# Altium PCB AP2-Core.PcbDoc (part 1 of 3)
Units mm, origin at the board's own origin, x right, y up, seen from the top; angles counter-clockwise.
Board outline 50.2 x 44.2 mm, 4 copper layers (顶层, MidLayer1, MidLayer2, 底层); 65 components, 157 nets, 448 pads, 134 vias.
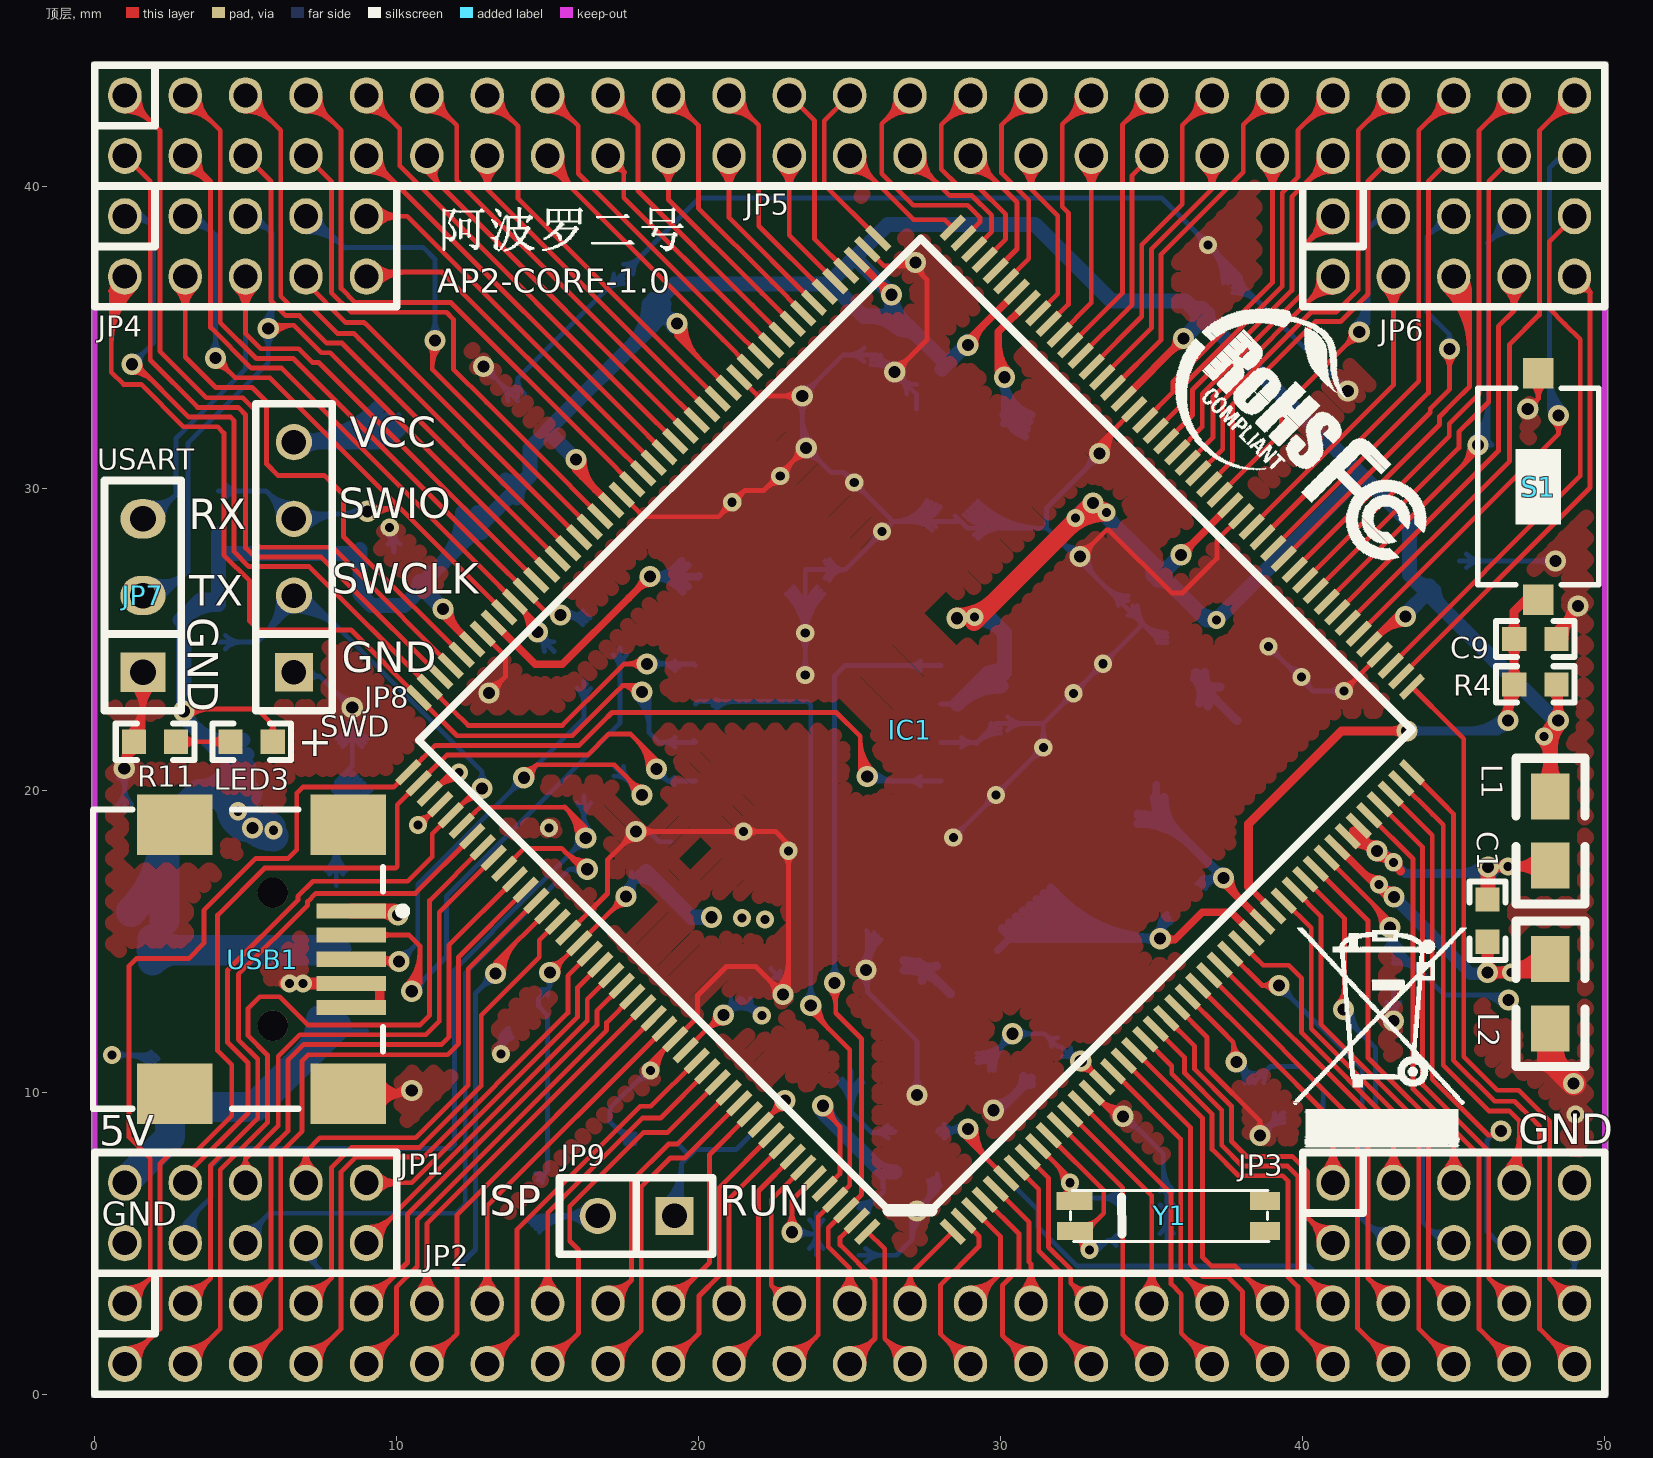
[diagram p0: 顶层 view]
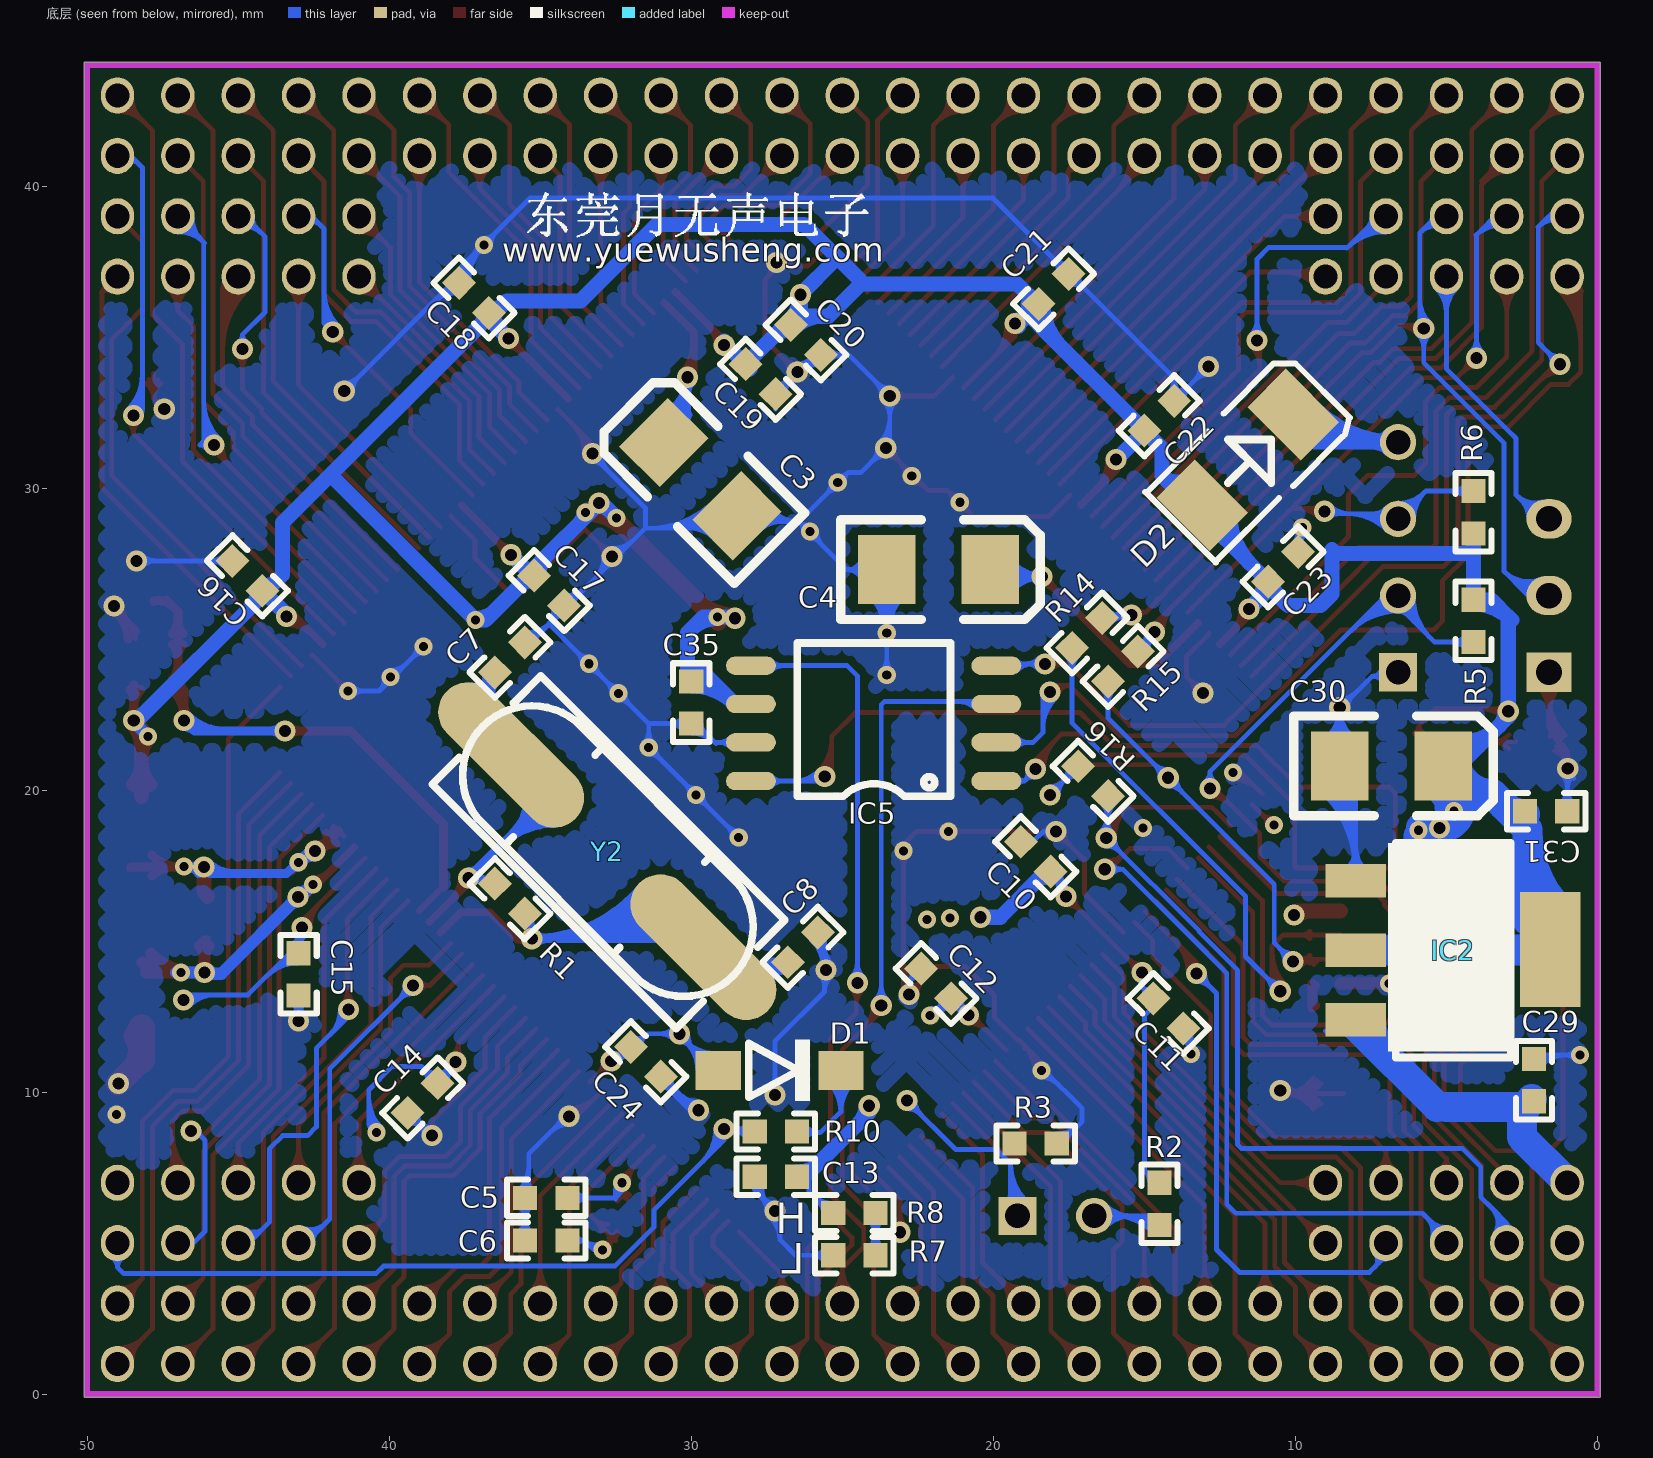
[diagram p1: 底层 view, seen from below]
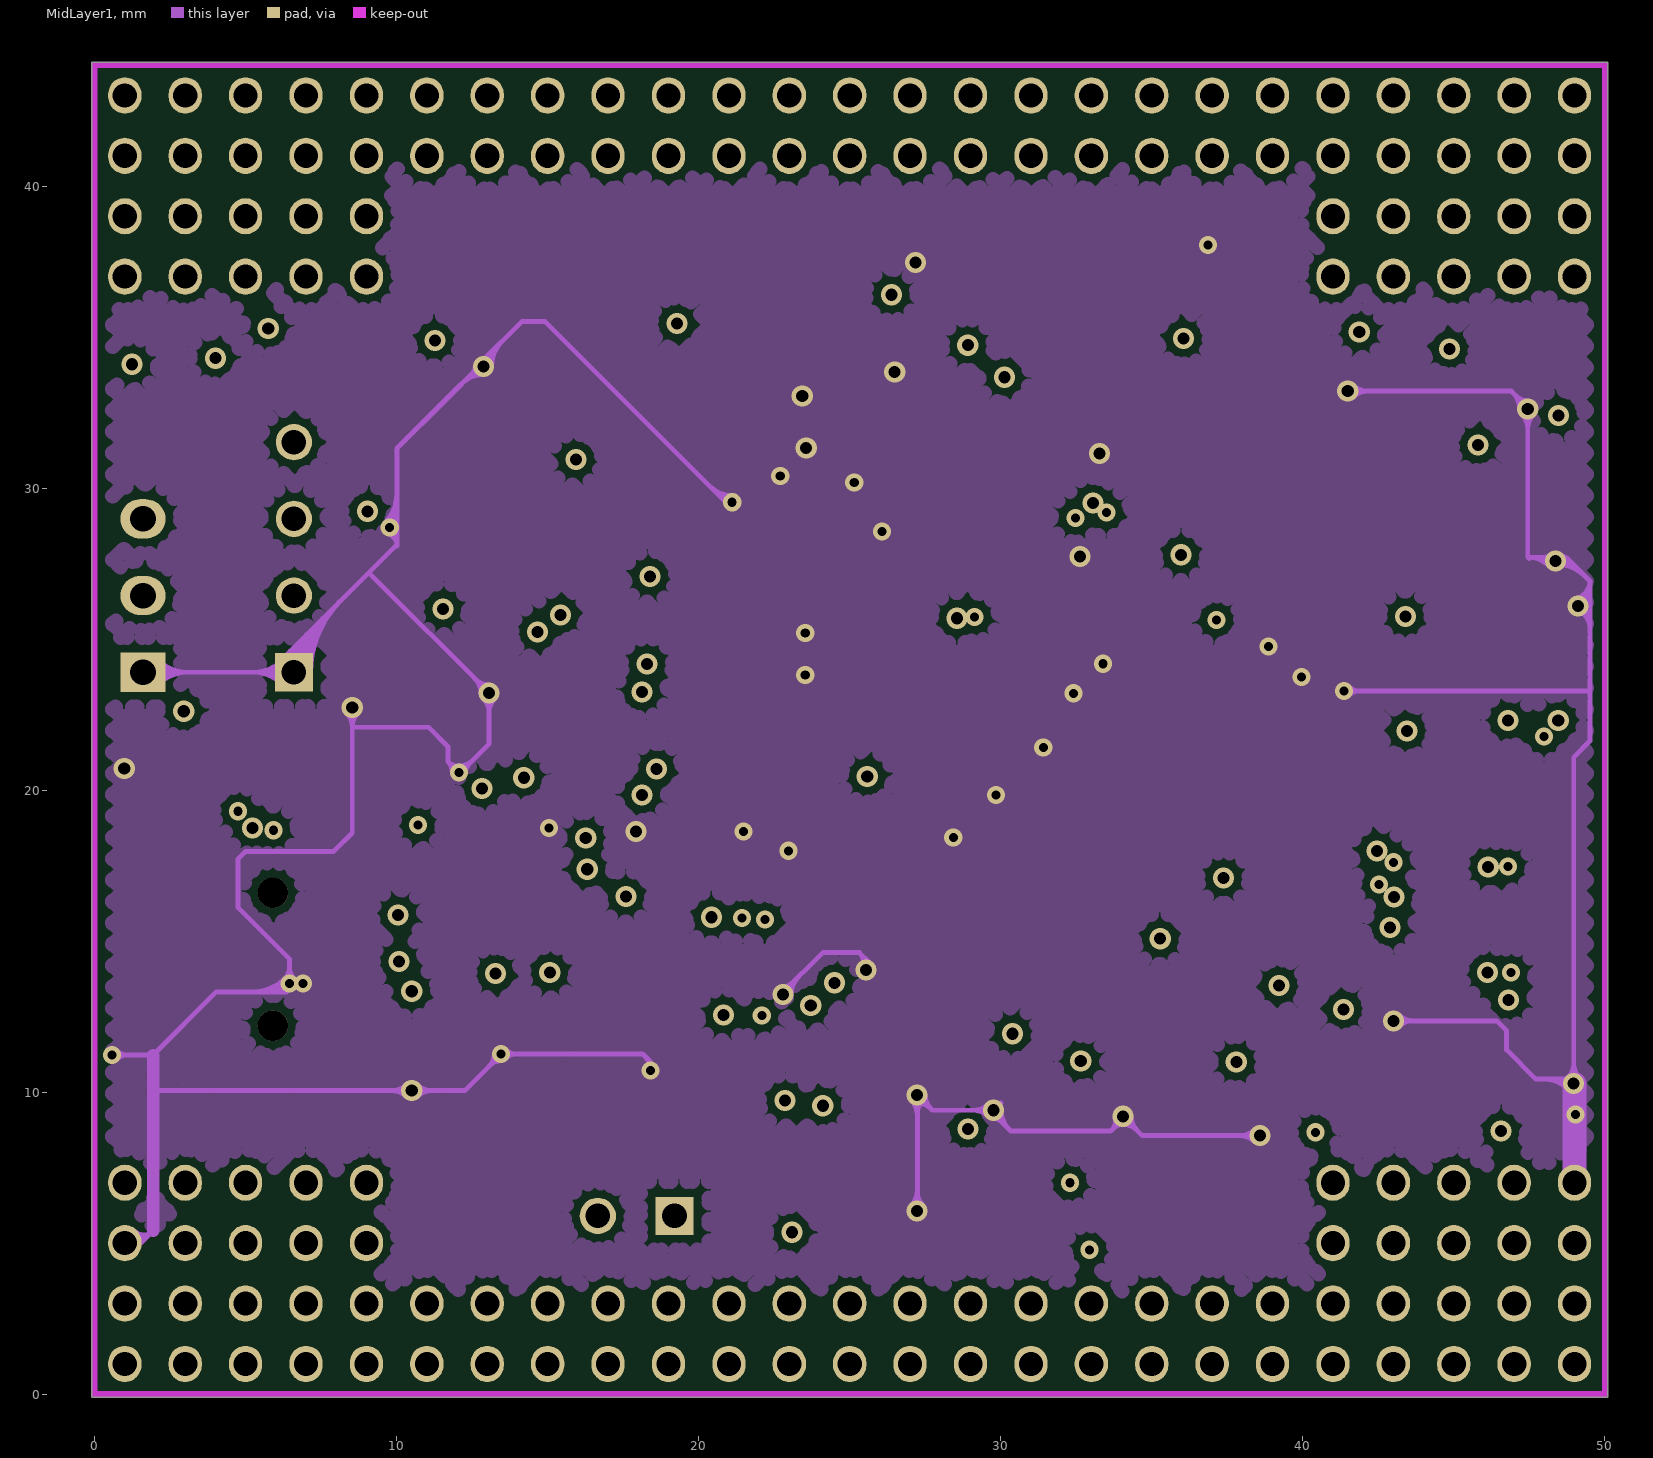
[diagram p2: MidLayer1]
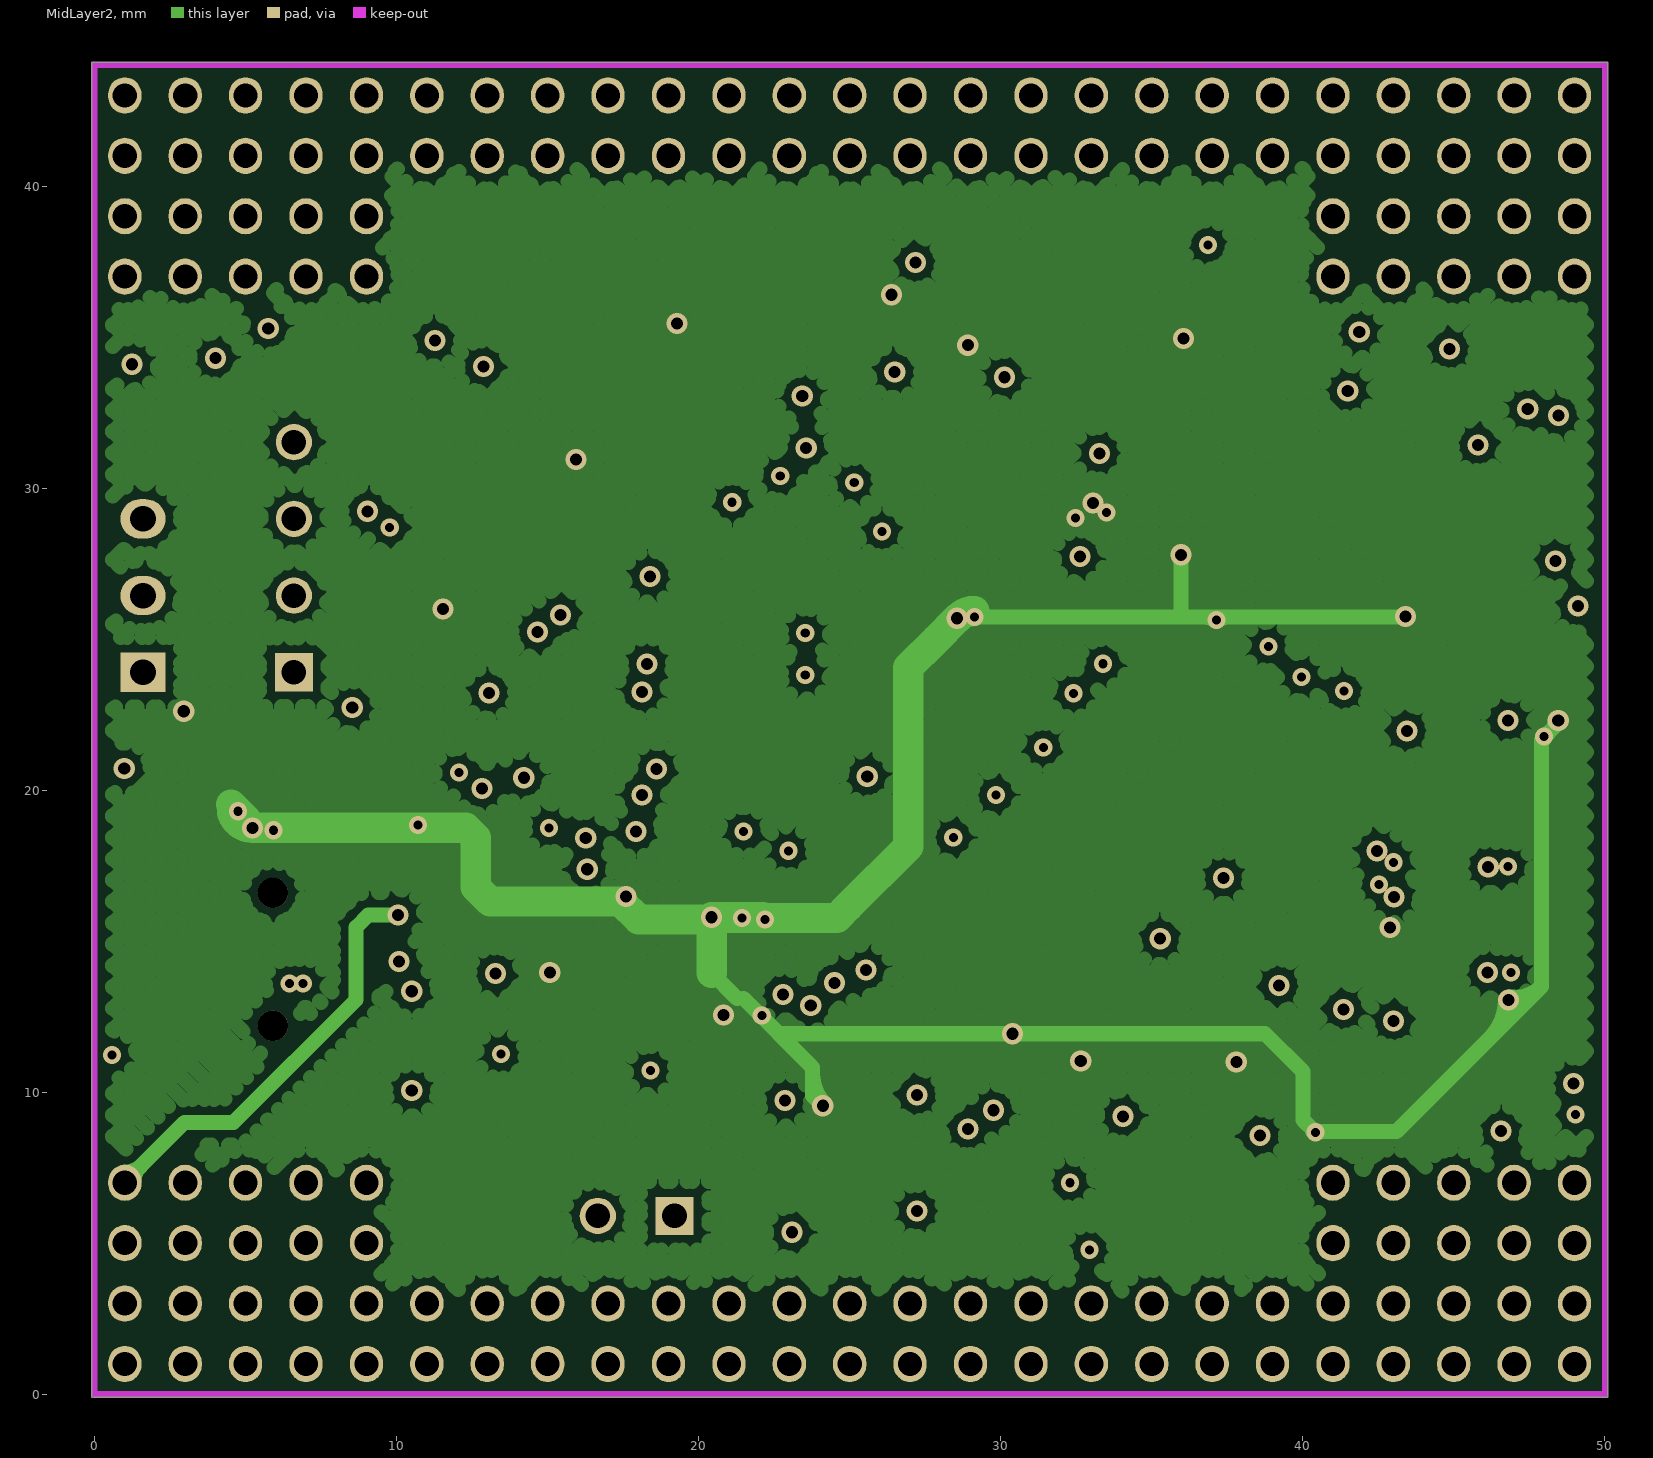
[diagram p3: MidLayer2]

## Layer stack, top to bottom
顶层: signal copper 0.0356
Dielectric: core 0.32, FR-4, Dk 4.8
MidLayer1: signal copper 0.0356
Dielectric: prepreg 0.32, FR-4, Dk 4.8
MidLayer2: signal copper 0.0356
Dielectric: core 0.32, FR-4, Dk 4.8
底层: signal copper 0.0356

## Board outline
-0.1,-0.1 50.1,-0.1 50.1,44.1 -0.1,44.1

## Design rules (kind name [scope] priority, off if disabled: settings)
Clearance 留空 [All] p1: gap=0.16
ComponentClearance 元件留空 [All] p1 off: gap=0.254 collisioncheckmode=3 verticalgap=0.254 showdistances=FALSE
FabricationTestPointUsage 测试点用法 [All] p1: valid=0 allowmultiple=FALSE
FabricationTestpoint 测试点 [All] p1: side=3 testpointundercomponent=TRUE minsize=1.016 maxsize=2.54 preferedsize=1.524 minholesize=0.508 maxholesize=1.016 preferedholesize=0.813 testpointgrid=0.025 allowsidetop=TRUE allowsidebottom=TRUE usegrid=TRUE gridtolerance=0
HoleSize 孔尺寸 [All] p1: absolutevalues=TRUE maxlimit=2.54 minlimit=0.025 maxpercent=80.000 minpercent=20.000
LayerPairs 层对 [All] p1: enforce=TRUE
PasteMaskExpansion 阻粘层扩充 [All] p1: expansion=0
PlaneClearance Plane留空 [All] p1: clearance=0.508
PlaneConnect Plane连接 [All] p1: planeconnectstyle=NoConnect reliefexpansion=0.508 reliefentries=4 reliefconductorwidth=0.254 reliefairgap=0.254
PolygonConnect 多边形连接 [All] p1: connectstyle=NoConnect reliefconductorwidth=0.254 reliefentries=4 polygonreliefangle="45 Angle" airgapwidth=0.254
RoutingCorners 布线拐角 [All] p1: cornerstyle=45-Degree minsetback=2.54 maxsetback=2.54
RoutingLayers 布线层 [All] p1: top layer_v5=FALSE mid layer 1_v5=FALSE mid layer 2_v5=FALSE bottom layer_v5=FALSE
RoutingPriority 布线优先级 [All] p1: routingpriority=0
RoutingTopology 布线拓扑 [All] p1: topology=Shortest
RoutingVias 布线过孔 [All] p1: holewidth=0.4 width=0.7 viastyle="Through Hole" minholewidth=0.4 minwidth=0.7 maxholewidth=1.5 maxwidth=2
ShortCircuit 短路 [All] p1: allowed=FALSE
SolderMaskExpansion 阻焊层扩充 [All] p1: expansion=0.102
UnRoutedNet 未布线网络 [All] p1:
Width 宽度 [All] p1: maxlimit=1 minlimit=0.16 preferedwidth=0.16
14 further rules are at their usual default settings.

## Components (designator, comment, footprint, x,y, rotation, side; value= is the part's Value field where it differs from the comment)
C1 "104" 0603P 46.12,14.98 r90 top
C3 "2.2uF" 3528 30.91,31.51 r45 bottom
C4 "2.2uF" 3528 20.1,27.3 r180 bottom
C5 "15" 0603P 35.5,6.5 r180 bottom
C6 "15" 0603P 35.5,5.088 r180 bottom
C7 "15" 0603P 36.5,23.9 r135 bottom
C8 "15" 0603P 26.8,14.3 r135 bottom
C9 "104" 0603P 47,25 r0 top
C10 "104" 0603P 18.1,17.3 r45 bottom
C11 "104" 0603P 14.7,13.1 r225 bottom
C12 "104" 0603P 21.4,13.1 r45 bottom
C13 "104" 0603P 26.5,7.2 r0 bottom
C14 "104" 0603P 38.4,10.3 r315 bottom
C15 "104" 0603P 43,14.6 r270 bottom
C16 "104" 0603P 44.2,26.6 r45 bottom
C17 "104" 0603P 35.2,27.1 r225 bottom
C18 "104" 0603P 36.7,35.8 r45 bottom
C19 "104" 0603P 28.2,34.1 r225 bottom
C20 "104" 0603P 26.7,35.4 r225 bottom
C21 "104" 0603P 18.5,36.1 r135 bottom
C22 "104" 0603P 15,31.9 r135 bottom
C23 "104" 0603P 10.9,26.9 r135 bottom
C24 "104" 0603P 32,11.5 r225 bottom
C29 "104" 0603P 2.1,11.1 r270 bottom
C30 "22uF" 3528 5.1,20.8 r180 bottom
C31 "104" 0603P 1,19.3 r0 bottom
C35 "104" 0603P 30,23.6 r270 bottom
D1 "4148" DIODE_SOP 29.11,10.72 r180 bottom
D2 "5817" T5817 9.1,33.3 r135 bottom
IC1 "STM32_176" LQFP176 27,22 r45 top locked
IC2 "AMS1117-3.3" SOT-223 8,17 r270 bottom
IC5 "AT45DBX" SOIC-8 19.9,20.3 r0 bottom
JP1 "" DIP2.0-10 1,7 r0 top locked
JP2 "" DIP2.0-50 1,3 r0 top locked
JP3 "" DIP2.0-10 41,7 r0 top locked
JP4 "" DIP2.0-10 1,39 r0 top locked
JP5 "" DIP2.0-50 1,43 r0 top locked
JP6 "" DIP2.0-10 41,39 r0 top locked
JP7 "USART" SIP3 1.6,23.9 r90 top
JP8 "SWD" SIP4 6.6,23.9 r90 top
JP9 "BOOT0" SIP2 19.2,5.9 r180 top
L1 "100uH" 0805 48.2,17.5 r90 top
L2 "100uH" 0805 48.2,14.4 r270 top
LED3 "POWER" 0603P 5.9,21.6 r180 top
R1 "105" 0603P 36.5,16.9 r225 bottom
R2 "102" 0603P 14.5,5.6 r90 bottom
R3 "103" 0603P 17.9,8.3 r0 bottom
R4 "103" 0603P 48.4,23.5 r180 top
R5 "103" 0603P 4.1,26.3 r270 bottom
R6 "103" 0603P 4.1,28.5 r90 bottom
R7 "103" 0603P 25.3,4.6 r180 bottom
R8 "103" 0603P 25.3,6 r180 bottom
R10 "1.5K" 0603P 27.9,8.7 r180 bottom
R11 "510" 0603P 2.7,21.6 r180 top
R14 "10" 0603P 16.4,25.7 r315 bottom
R15 "10" 0603P 16.2,23.6 r135 bottom
R16 "1.5K" 0603P 16.2,19.8 r45 bottom
S1 "RESRT" SW-PB2 47.8,26.3 r90 top
USB1 "USB" MINIUSB-SMB 8.5,16 r180 top locked
Y1 "32768" MC-146 35.6,5.9 r0 top
Y2 "25M" XTALV-49USMD 29.6,14.8 r45 bottom
? "" YWS 35,39 r180 bottom
? "" HS 42.562,12.573 r0 top
? "" fc 40.5,31.2 r315 top
? "" apllo2 11.6,38.1 r0 top

## Footprints (in the part's own frame and the unit in brackets; to place one, negate y for a bottom-side part, rotate by r counter-clockwise, add the part's x,y. Pads: shape width x height; smd on the part's side, far side on the other; paste and mask are expansions set on the pad)
0603P [mm]
  rect 0.8x0.8 smd: 1(0,0) 2(1.4,0)
  silkscreen extent -0.6,-0.6 2,0.6
0805 [mil]
  rect 60x50 smd: 1(0,0) 2(90,0)
  silkscreen extent -50,-45 140,45
3528 [mil]
  rect 75x90 smd: 1(0,0) 2(-135,0)
  silkscreen extent -195,-65 65,65
apllo2 [mm]
  silkscreen extent -0.06,-0.25 7.89,1.2
DIODE_SOP [mm]
  rect 1.5x1.3 smd: 1(0,0) 2(4.064,0)
  silkscreen extent 1.02,-1.02 3.05,1.02
DIP2.0-10 [mm]
  oval 1.1x1.2 hole 0.8: 1(0,0) 2(0,-2) 3(2,0) 4(2,-2) 5(4,0) 6(4,-2) 7(6,0) 8(6,-2) 9(8,0) 10(8,-2)
  silkscreen extent -1,-3 9,1
DIP2.0-50 [mm]
  oval 1.1x1.2 hole 0.8: 1(0,0) 2(0,-2) 3(2,0) 4(2,-2) 5(4,0) 6(4,-2) 7(6,0) 8(6,-2) 9(8,0) 10(8,-2) 11(10,0) 12(10,-2) 13(12,0) 14(12,-2) 15(14,0) 16(14,-2) 17(16,0) 18(16,-2) 19(18,0) 20(18,-2) 21(20,0) 22(20,-2) 23(22,0) 24(22,-2) 25(24,0) 26(24,-2) 27(26,0) 28(26,-2) 29(28,0) 30(28,-2) 31(30,0) 32(30,-2) 33(32,0) 34(32,-2) 35(34,0) 36(34,-2) 37(36,0) 38(36,-2) 39(38,0) 40(38,-2) 41(40,0) 42(40,-2) 43(42,0) 44(42,-2) 45(44,0) 46(44,-2) 47(46,0) 48(46,-2) 49(48,0) 50(48,-2)
  silkscreen extent -1,-3 49,1
fc [mm]
  silkscreen extent -5.53,-2.62 4.36,3
HS [mm]
  silkscreen extent -2.87,-4.39 2.87,2.87
LQFP176 [mm]
  round 1 on Top Overlay: 0(0,0)
  rect 0.25x1 smd: 1(-10.75,-12.75) 2(-10.25,-12.75) 3(-9.75,-12.75) 4(-9.25,-12.75) 5(-8.75,-12.75) 6(-8.25,-12.75) 7(-7.75,-12.75) 8(-7.25,-12.75) 9(-6.75,-12.75) 10(-6.25,-12.75) 11(-5.75,-12.75) 12(-5.25,-12.75) 13(-4.75,-12.75) 14(-4.25,-12.75) 15(-3.75,-12.75) 16(-3.25,-12.75) 17(-2.75,-12.75) 18(-2.25,-12.75) 19(-1.75,-12.75) 20(-1.25,-12.75) 21(-0.75,-12.75) 22(-0.25,-12.75) 23(0.25,-12.75) 24(0.75,-12.75) 25(1.25,-12.75) 26(1.75,-12.75) 27(2.25,-12.75) 28(2.75,-12.75) 29(3.25,-12.75) 30(3.75,-12.75) 31(4.25,-12.75) 32(4.75,-12.75) 33(5.25,-12.75) 34(5.75,-12.75) 35(6.25,-12.75) 36(6.75,-12.75) 37(7.25,-12.75) 38(7.75,-12.75) 39(8.25,-12.75) 40(8.75,-12.75) 41(9.25,-12.75) 42(9.75,-12.75) 43(10.25,-12.75) 44(10.75,-12.75) 89(10.75,12.25) 90(10.25,12.25) 91(9.75,12.25) 92(9.25,12.25) 93(8.75,12.25) 94(8.25,12.25) 95(7.75,12.25) 96(7.25,12.25) 97(6.75,12.25) 98(6.25,12.25) 99(5.75,12.25) 100(5.25,12.25) 101(4.75,12.25) 102(4.25,12.25) 103(3.75,12.25) 104(3.25,12.25) 105(2.75,12.25) 106(2.25,12.25) 107(1.75,12.25) 108(1.25,12.25) 109(0.75,12.25) 110(0.25,12.25) 111(-0.25,12.25) 112(-0.75,12.25) 113(-1.25,12.25) 114(-1.75,12.25) 115(-2.25,12.25) 116(-2.75,12.25) 117(-3.25,12.25) 118(-3.75,12.25) 119(-4.25,12.25) 120(-4.75,12.25) 121(-5.25,12.25) 122(-5.75,12.25) 123(-6.25,12.25) 124(-6.75,12.25) 125(-7.25,12.25) 126(-7.75,12.25) 127(-8.25,12.25) 128(-8.75,12.25) 129(-9.25,12.25) 130(-9.75,12.25) 131(-10.25,12.25) 132(-10.75,12.25)
  rect 1x0.25 smd: 45(12.75,-10.75) 46(12.75,-10.25) 47(12.75,-9.75) 48(12.75,-9.25) 49(12.75,-8.75) 50(12.75,-8.25) 51(12.75,-7.75) 52(12.75,-7.25) 53(12.75,-6.75) 54(12.75,-6.25) 55(12.75,-5.75) 56(12.75,-5.25) 57(12.75,-4.75) 58(12.75,-4.25) 59(12.75,-3.75) 60(12.75,-3.25) 61(12.75,-2.75) 62(12.75,-2.25) 63(12.75,-1.75) 64(12.75,-1.25) 65(12.75,-0.75) 66(12.75,-0.25) 67(12.75,0.25) 68(12.75,0.75) 69(12.75,1.25) 70(12.75,1.75) 71(12.75,2.25) 72(12.75,2.75) 73(12.75,3.25) 74(12.75,3.75) 75(12.75,4.25) 76(12.75,4.75) 77(12.75,5.25) 78(12.75,5.75) 79(12.75,6.25) 80(12.75,6.75) 81(12.75,7.25) 82(12.75,7.75) 83(12.75,8.25) 84(12.75,8.75) 85(12.75,9.25) 86(12.75,9.75) 87(12.75,10.25) 88(12.75,10.75) 133(-12.75,10.75) 134(-12.75,10.25) 135(-12.75,9.75) 136(-12.75,9.25) 137(-12.75,8.75) 138(-12.75,8.25) 139(-12.75,7.75) 140(-12.75,7.25) 141(-12.75,6.75) 142(-12.75,6.25) 143(-12.75,5.75) 144(-12.75,5.25) 145(-12.75,4.75) 146(-12.75,4.25) 147(-12.75,3.75) 148(-12.75,3.25) 149(-12.75,2.75) 150(-12.75,2.25) 151(-12.75,1.75) 152(-12.75,1.25) 153(-12.75,0.75) 154(-12.75,0.25) 155(-12.75,-0.25) 156(-12.75,-0.75) 157(-12.75,-1.25) 158(-12.75,-1.75) 159(-12.75,-2.25) 160(-12.75,-2.75) 161(-12.75,-3.25) 162(-12.75,-3.75) 163(-12.75,-4.25) 164(-12.75,-4.75) 165(-12.75,-5.25) 166(-12.75,-5.75) 167(-12.75,-6.25) 168(-12.75,-6.75) 169(-12.75,-7.25) 170(-12.75,-7.75) 171(-12.75,-8.25) 172(-12.75,-8.75) 173(-12.75,-9.25) 174(-12.75,-9.75) 175(-12.75,-10.25) 176(-12.75,-10.75)
  silkscreen extent -11.75,-11.75 11.75,11.25
MC-146 [mm]
  rect 1.2x0.6 smd: 1(-3.153,0.501) 2(-3.143,-0.5)
  rect 1x0.6 smd: 3(3.153,-0.501) 4(3.153,0.49)
  silkscreen extent -3.29,-0.85 3.28,0.85
MINIUSB-SMB [mm]
  rect 2.3x0.5 smd: 1(0,0) 2(0,0.8) 3(0,1.6) 4(0,2.4) 5(0,3.2)
  rect 2.5x2 smd: 6(0.1,6.05) 7(5.854,6.05) 8(0.1,-2.85) 9(5.854,-2.85)
  round 1 hole 1 unplated: MH1(2.6,3.8) MH2(2.6,-0.6)
  silkscreen extent -1.82,-3.35 8.55,6.55
SIP2 [mm]
  rect 1.27x1.27 hole 0.813: 1(0,0)
  round 1.2 hole 0.813: 2(2.54,0)
  silkscreen extent -1.27,-1.27 3.81,1.27
SIP3 [mm]
  rect 1.3x1.5 hole 0.85: 1(0,0)
  oval 1.3x1.5 hole 0.85: 2(2.54,0) 3(5.08,0)
  silkscreen extent -1.27,-1.27 6.35,1.27
SIP4 [mm]
  rect 1.27x1.27 hole 0.813: 1(0,0)
  round 1.2 hole 0.813: 2(2.54,0) 3(5.08,0) 4(7.62,0)
  silkscreen extent -1.27,-1.27 8.89,1.27
SOIC-8 [mil]
  oval 65x24 smd: 1(0,0) 2(0,-50.39) 3(0,-100.39) 4(0,-150.39) 5(319.82,-150.39) 6(319.82,-100.39) 7(319.82,-50.39) 8(319.82,0)
  silkscreen extent 60,-180 260,20
SOT-223 [mm]
  rect 1.1x2.007 smd: 1(0,0) 2(2.3,0) 3(4.6,0)
  rect 3.81x2.007 smd: 4(2.283,6.44)
  silkscreen extent -1.26,1.32 5.86,5.13
SW-PB2 [mm]
  rect 1x1 smd: 1(0,0) 2(7.5,0)
  silkscreen extent 0.5,-2 7,2
T5817 [mm]
  rect 1.8x2.5 smd: A(-5.55,0.075) K(-1.3,0.075)
  silkscreen extent -6.58,-1.61 -0.05,1.73
XTALV-49USMD [mm]
  oval 6x2 smd: 1(0,0) 2(9,0)
  silkscreen extent -1.37,-2.54 10.33,2.54
YWS [mm]
  silkscreen extent -0.44,-0.7 10.86,0.77

## Free pads (board coordinates)
  round 1 on Top Overlay: 0(27.02,5.12)

## Via types
v1: diameter 0.7, hole 0.4, 顶层 to 底层, 90 vias
v2: diameter 0.6, hole 0.3, 顶层 to 底层, 44 vias

## Nets (pads, with @x,y where several pads share a name; then routed paths per layer and width w, separated by ;. In a path a pad name is that pad's centre, name@x,y a point inside that pad or via, vN(x,y) a via of type N, cw(c..) or ccw(c..) an arc to the next point about the centre after c; other vN are vias at no path point)
GND: C3.2 C4.2 C5.1 C6.1 C7.2 C8.2 C9.2 C10.2 C11.2 C12.2 C13.2 C14.2 C15.2 C16.2 C17.2 C18.2 C19.2 C20.2 C21.2 C22.2 C23.2 C24.2 C29.1 C30.2 C31.1 C35.2 IC1.14 IC1.22 IC1.48 IC1.61 IC1.71 IC1.90 IC1.102 IC1.113 IC1.126 IC1.135 IC1.148 IC1.158 IC2.1 IC5.7 JP1.2 JP3.9 JP7.1 JP8.1 L2.2 R3.1 R7.1 R11.2 S1.2 USB1.4 USB1.5 USB1.6 | length 643.8
  顶层 w0.16: v1@0.84,20.941 ccw(c0.688,21.19) 0.98,21.19 ; v1@0.98,20.654 cw(c1.679,20.654) R11.2@1.419,21.303 ; v1(0.98,20.71) 0.98,21.19 ; v1@0.98,20.891 cw(c1.584,20.891) R11.2@1.359,21.451 ; 0.98,21.127 cw(c1.489,21.127) R11.2@1.3,21.6 ; R11.2@1.01,21.31 R11.2@1.3,21.6 ; R11.2@1.074,21.826 ccw(c-0.197,23.097) 1.6,23.097 ; v1@1.12,20.941 cw(c1.272,21.19) 0.98,21.19 ; R11.2@1.187,21.713 ccw(c0.189,22.711) 1.6,22.711 ; JP7.1@1.197,23.497 cw(c0.224,22.524) 1.6,22.524 cw(c2.976,22.524) JP7.1@2.003,23.497 ; R11.2@1.3,21.77 1.6,22.07 ; R11.2@1.3,21.92 ccw(c1.3,22.282) 1.556,22.026 ; JP7.1@1.31,23.61 cw(c0.61,22.91) 1.6,22.91 cw(c2.59,22.91) JP7.1@1.89,23.61 ; R11.2@1.569,21.774 cw(c1.767,21.903) 1.6,22.07 ; 1.6,22.324 cw(c0.576,22.324) R11.2@1.3,21.6 ; JP7.1@1.6,23.9 1.6,22.07 ; USB1.6@8.4,9.95 v1@10.4,9.95 ; USB1.6@9.144,9.61 cw(c9.791,9.165) 9.791,9.95 cw(c9.791,10.735) USB1.6@9.144,10.29 ; USB1.6@9.276,9.519 cw(c10.096,8.955) 10.096,9.95 cw(c10.096,10.945) USB1.6@9.276,10.381 ; USB1.6@9.408,9.428 cw(c10.4,8.746) v1@10.4,9.95 ; USB1.6@9.408,10.472 ccw(c10.4,11.154) v1@10.4,9.95 ; USB1.5@9.44,12.79 USB1.5@9.48,12.75 ; USB1.6@9.607,9.95 ccw(c9.607,10.943) v1@10.309,10.241 ; 9.993,9.95 ccw(c9.993,10.557) v1@10.422,10.128 ; 10.09,9.95 cw(c10.09,9.64) v1@10.309,9.859 ; v1(10.5,10.05) v1@10.4,9.95 ; IC1.135@11.09,19.879 11.791,20.58 v2(12.06,20.58) ; IC1.135@11.226,20.015 cw(c12.06,19.18) v2@12.06,20.36 ; 11.499,20.288 cw(c12.06,19.727) v2@12.06,20.52 ; IC1.126@12.858,25.182 13.6,24.44 13.6,23.76 v1(13.06,23.22) ; v1@13.06,23.49 ccw(c13.06,24.142) 13.521,23.681 ccw(c13.982,23.22) v1@13.33,23.22 ; IC1.148@15.686,15.282 16.98,16.576 16.98,17.69 17.43,18.14 v1(17.92,18.63) 22.55,18.63 22.97,18.21 v1@22.97,13.51 ; IC1.113@17.454,29.778 18.182,29.05 20.66,29.05 21.53,29.92 ; v1@17.65,18.63 cw(c16.998,18.63) 17.459,18.169 cw(c17.92,17.708) v1@17.92,18.36 ; v1@18.111,18.439 cw(c18.572,17.978) 18.572,18.63 cw(c18.572,19.282) v1@18.111,18.821 ; v2(18.41,10.71) 18.41,10.98 19.177,11.747 IC1.158@19.222,11.747 19.96,12.485 19.96,13.2 20.92,14.16 21.89,14.16 22.61,13.44 22.66,13.44 v1@22.98,13.12 ; v2@18.47,10.71 cw(c19.267,10.71) 18.703,11.273 ; v2@18.63,10.71 cw(c19.813,10.71) IC1.158@18.976,11.546 ; 18.803,11.373 cw(c18.957,11.22) IC1.158@18.957,11.437 ; 20.713,29.103 ccw(c20.286,29.53) v2@20.89,29.53 ; 20.786,29.176 cw(c21.11,28.851) v2@21.11,29.31 ; v2@21.113,29.75 ccw(c21.119,30.33) 21.53,29.92 ; v2@21.33,29.53 cw(c21.789,29.53) 21.464,29.854 ; v2@21.334,18.474 ccw(c20.959,18.099) 20.959,18.63 ccw(c20.959,19.161) v2@21.334,18.786 ; IC1.102@21.343,33.667 21.96,33.05 v1(23.43,33.05) ; v2@21.646,18.474 cw(c22.021,18.099) 22.021,18.63 cw(c22.021,19.161) v2@21.646,18.786 ; 22.205,29.975 cw(c22.7,29.48) v2@22.7,30.18 ; 22.308,13.742 cw(c21.796,13.23) v1@22.52,13.23 ; 22.374,30.144 ccw(c22.118,30.4) v2@22.48,30.4 ; 22.38,13.67 ccw(c22.79,14.079) v1@22.79,13.5 ; v1@22.599,13.421 ccw(c21.704,14.316) 22.97,14.316 ; v2@22.7,30.62 ccw(c22.7,30.982) 22.956,30.726 ; v1@22.712,13.308 ccw(c22.09,13.93) 22.97,13.93 ; 22.713,18.467 cw(c22.236,17.991) v2@22.91,17.99 ; v2@22.814,17.834 cw(c22.439,17.459) 22.97,17.459 cw(c23.501,17.459) v2@23.126,17.834 ; v1@22.825,13.195 ccw(c22.476,13.544) 22.97,13.544 ; v2@22.92,30.4 cw(c23.62,30.4) 23.125,30.895 ; v1@23.239,32.859 ccw(c22.778,32.398) 22.778,33.05 ccw(c22.778,33.702) v1@23.239,33.241 ; v1@23.29,31.33 cw(c22.638,31.33) 23.099,30.869 cw(c23.56,30.408) v1@23.56,31.06 ; v1(23.56,31.33) 22.15,29.92 21.53,29.92 ; IC1.90@25.586,37.91 26.146,37.35 27.06,37.35 v1(27.18,37.47) 27.18,37.28 27.56,36.9 27.56,34.91 v1(26.49,33.84) ; 26.238,37.35 ccw(c26.238,38.412) v1@26.989,37.661 ; v1@26.49,34.11 ccw(c26.49,34.762) 26.951,34.301 ccw(c27.412,33.84) v1@26.76,33.84 ; 26.625,37.35 ccw(c26.625,38.025) v1@27.102,37.548 ; 26.818,37.35 cw(c26.818,37.108) v1@26.989,37.279 ; v1@27.18,37.2 cw(c27.18,37.007) 27.317,37.143 ; v1@27.276,37.417 ccw(c27.476,37.307) 27.315,37.145 ; v1@27.416,37.339 ccw(c27.67,37.2) 27.465,36.995 ; v1(32.62,27.73) 33.5,28.61 33.58,28.61 35.66,26.53 36.018,26.53 36.71,27.222 37.159,27.671 37.159,28.27 IC1.61@37.96,29.071 ; v1@32.62,28 ccw(c32.62,28.652) 33.081,28.191 ccw(c33.542,27.73) v1@32.89,27.73 ; IC1.14@33.01,9.979 33.79,9.2 v1(34.05,9.2) ; IC1.14@33.145,9.845 ccw(c34.05,10.751) v1@34.05,9.47 ; v1@33.22,31.15 cw(c33.828,31.15) 33.398,31.58 ; v1(33.27,31.15) 33.27,31.452 IC1.71@34.425,32.607 ; v1@33.38,31.15 cw(c34.375,31.15) 33.671,31.853 ; 33.418,9.572 ccw(c34.05,10.204) v1@34.05,9.31 ; v1@33.54,31.15 cw(c34.921,31.15) 33.944,32.126 ; 33.691,9.299 ccw(c34.05,9.658) v1@34.05,9.15 ; IC1.22@35.839,12.808 36.83,11.816 36.83,10.798 38.58,9.048 ; v1@38.436,8.789 ccw(c38.274,9.048) 38.58,9.048 ; v1(38.58,8.56) 38.58,9.048 ; v1@38.724,8.789 cw(c38.886,9.048) 38.58,9.048 ; v2(41.361,23.28) IC1.48@42.556,24.475 ; v2@41.361,23.5 ccw(c41.361,24.031) 41.737,23.656 ccw(c42.113,23.28) v2@41.581,23.28 ; v1(47.45,32.62) 47.8,32.97 ; v1@47.507,32.884 ccw(c47.575,33.195) 47.8,32.97 ; S1.2@47.551,33.462 cw(c47.19,32.97) 47.8,32.97 ; S1.2@47.646,33.591 cw(c47.422,33.286) 47.8,33.286 cw(c48.178,33.286) S1.2@47.954,33.591 ; v1@47.714,32.677 cw(c48.025,32.745) 47.8,32.97 ; S1.2@47.8,33.8 47.8,32.97 ; S1.2@48.049,33.462 ccw(c48.41,32.97) 47.8,32.97 ; C9.2@48.4,25 C9.2@48.4,25.26 ; v1@49.11,25.97 v1(49.11,26.09)
  顶层 w0.3: USB1.5@9.329,12.871 ccw(c9.062,13.138) 9.44,13.138 ; USB1.4@9.329,13.529 cw(c9.062,13.262) 9.44,13.262 ; USB1.5@9.44,12.79 USB1.4@9.44,13.6 ; C9.2@48.4,25.26 v1@49.11,25.97 ; C9.2@48.65,25 cw(c49.881,25) v1@49.011,25.871 ; 48.684,25.544 ccw(c48.137,26.09) v1@48.91,26.09
  顶层 w0.4: v2@6.29,13.6 USB1.4@8.5,13.6
  顶层 w0.8: 48.2,11.06 v1(48.97,10.29) ; L2.2@48.396,11.857 ccw(c49.126,11.373) 48.506,10.754
  顶层 w0.9: 48.2,11.06 L2.2@48.2,12.114
  MidLayer1 w0.16: v2(0.57,11.23) 1.94,11.23 4.03,13.32 6.35,13.32 v2@6.66,13.63 ; v2@0.726,11.074 cw(c1.101,10.699) 1.101,11.23 cw(c1.101,11.761) v2@0.726,11.386 ; JP1.2@0.993,5.043 ccw(c1.283,5.358) 1.585,5.055 ; JP1.2@1,5 1.53,5 1.94,5.41 cw(c1.622,5.728) JP1.2@1.318,5.396 ; JP1.2@1.101,5.161 ccw(c1.396,5.482) 1.704,5.174 ; JP1.2@1.209,5.279 ccw(c1.509,5.605) 1.822,5.292 ; JP7.1@1.6,23.9 6.97,23.9 JP8.1@6.99,23.88 ; 1.94,9.93 2.06,10.05 v1(10.5,10.05) 12.26,10.05 v2@13.452,11.242 ; JP7.1@1.99,23.61 cw(c2.69,22.91) 2.69,23.9 cw(c2.69,24.89) JP7.1@1.99,24.19 ; JP7.1@2.103,23.497 cw(c3.076,22.524) 3.076,23.9 cw(c3.076,25.276) JP7.1@2.103,24.303 ; 5.243,13.32 ccw(c5.243,14.807) 6.294,13.756 ccw(c5.919,14.131) 6.45,14.131 ccw(c6.981,14.131) v2@6.606,13.756 ; 5.629,13.32 ccw(c5.629,14.421) v2@6.408,13.642 ; 6.015,13.32 ccw(c6.015,14.035) v2@6.521,13.529 ; JP8.1@6.195,23.9 cw(c7.197,23.9) 6.488,24.608 ; JP8.1@6.2,23.9 6.2,24.32 10.01,28.13 10.01,31.31 11.6,32.9 12.73,34.03 v1(12.87,34.03) 12.87,34.24 14.14,35.51 14.92,35.51 17.52,32.91 20.9,29.53 v2(21.11,29.53) ; JP8.1@6.208,23.508 ccw(c5.26,22.56) 5.26,23.9 ccw(c5.26,25.24) JP8.1@6.208,24.292 ; JP8.1@6.321,23.621 ccw(c5.646,22.946) 5.646,23.9 ccw(c5.646,24.854) JP8.1@6.321,24.179 ; JP8.1@6.355,23.9 cw(c7.743,23.9) 6.762,24.882 ; v2@6.429,13.399 cw(c6.793,13.035) v2@6.889,13.541 ; v2(6.45,13.6) 6.45,14.41 4.75,16.11 4.75,17.72 5,17.97 7.92,17.97 8.53,18.58 v1(8.53,22.74) ; JP8.1@6.515,23.9 cw(c8.289,23.9) 7.035,25.155 ; JP8.1@6.675,23.9 cw(c8.836,23.9) 7.308,25.428 ; JP8.1@6.835,23.9 cw(c9.382,23.9) 7.581,25.701 ; JP8.1@6.995,23.9 cw(c9.928,23.9) 7.854,25.974 ; JP8.1@7.155,23.9 cw(c10.475,23.9) 8.127,26.247 ; v1@8.339,22.549 cw(c7.878,22.088) 8.53,22.088 cw(c9.182,22.088) v1@8.721,22.549 ; 8.53,22.08 11.06,22.08 11.7,21.44 11.7,20.94 ; 9.096,27.216 9.096,27.184 v1(13.06,23.22) ; v2@9.614,28.856 ccw(c8.659,29.811) 10.01,29.811 ; v2@9.707,28.489 cw(c9.584,28.082) 10.01,28.082 ; v2@9.728,28.742 ccw(c9.046,29.424) 10.01,29.424 ; v2@9.753,28.643 cw(c9.649,28.297) 10.01,28.297 ; v2@9.799,28.796 cw(c9.713,28.512) 10.01,28.512 ; v2@9.841,28.629 ccw(c9.432,29.038) 10.01,29.038 ; v1@10.309,9.859 ccw(c9.848,9.398) 9.848,10.05 ccw(c9.848,10.702) v1@10.309,10.241 ; v1@10.691,9.859 cw(c11.152,9.398) 11.152,10.05 cw(c11.152,10.702) v1@10.691,10.241 ; v2@11.84,20.587 ccw(c11.361,20.601) 11.7,20.94 ; v2@12.053,20.8 cw(c12.039,21.279) 11.7,20.94 ; v2@12.06,20.8 ccw(c12.06,21.452) 12.521,20.991 ; 12.17,33.47 cw(c12.87,32.77) v1@12.87,33.76 ; v2@12.28,20.58 cw(c12.69,20.58) 12.4,20.87 ; 12.443,33.743 cw(c12.87,33.316) v1@12.87,33.92 ; 12.508,33.808 ccw(c12.286,34.03) v1@12.6,34.03 ; v1@12.79,23.22 ccw(c12.138,23.22) 12.599,23.681 ccw(c13.06,24.142) 13.06,23.49 13.06,21.53 12.11,20.58 v2(12.06,20.58) 11.7,20.94 ; v1@12.869,23.029 cw(c12.408,22.568) 13.06,22.568 cw(c13.712,22.568) v1@13.251,23.029 ; v1@12.98,34.03 cw(c13.753,34.03) 13.206,34.576 ; 13.062,10.852 ccw(c12.652,11.262) v2@13.232,11.262 ; 13.11,10.9 cw(c13.452,10.559) v2@13.452,11.042 ; v1@13.14,34.03 cw(c14.299,34.03) 13.479,34.849 ; v2(13.452,11.262) 18.148,11.262 18.41,11 v2(18.41,10.71) ; v2@13.607,11.106 cw(c13.983,10.731) 13.983,11.262 cw(c13.983,11.793) v2@13.607,11.417 ; 18.211,11.199 cw(c17.844,10.832) v2@18.351,10.723 ; 20.376,30.054 ccw(c21.11,30.788) v2@21.11,29.75 ; 20.649,29.781 ccw(c21.11,30.242) v2@21.11,29.59 ; v1(22.79,13.23) 22.79,13.3 24.11,14.62 25.32,14.62 25.64,14.3 25.64,14.14 v1(25.54,14.04) ; v1@22.79,13.5 ccw(c22.79,13.983) 23.131,13.641 ; v1@22.9,13.23 cw(c23.335,13.23) 23.027,13.537 ; v1@23.06,13.23 cw(c23.881,13.23) 23.3,13.81 ; 25.317,14.623 cw(c24.951,14.257) v1@25.437,14.078 ; 25.494,14.446 cw(c25.209,14.162) v1@25.587,14.023 ; v1@27.039,6.261 ccw(c26.554,6.746) 27.24,6.746 ; v1@27.039,9.719 cw(c26.554,9.234) 27.24,9.234 ; v1@27.23,9.64 cw(c27.23,8.988) 27.691,9.449 cw(c28.152,9.91) v1@27.5,9.91 ; 27.24,6.698 ccw(c27.858,6.698) v1@27.421,6.261 ; 27.24,9.282 cw(c27.858,9.282) v1@27.421,9.719 ; v1@27.43,6.07 27.06,6.07 27.24,6.25 27.24,9.9 v1(27.23,9.91) 27.74,9.4 v1(29.76,9.4) ; v1@29.569,9.209 ccw(c29.108,8.748) 29.108,9.4 ccw(c29.108,10.052) v1@29.569,9.591 ; v1@29.76,9.13 cw(c29.76,8.768) 30.016,9.024 ; v1@29.87,9.395 ccw(c30.36,9.374) 30.013,9.027 ; v1@29.894,9.634 ccw(c29.942,9.718) 30.01,9.65 ; v1@29.95,9.4 v1(29.76,9.4) ; v1@29.994,9.534 cw(c30.078,9.582) 30.01,9.65 ; v1@30.03,9.388 ccw(c30.852,9.352) 30.27,8.77 ; 33.68,8.75 ccw(c33.392,9.039) v1@33.788,9.136 ; 33.726,8.796 cw(c34.05,8.471) 34.05,8.93 cw(c34.05,8.278) 34.511,8.739 cw(c34.972,9.2) v1@34.32,9.2 ; v1@33.97,9.2 v1(34.05,9.2) ; v1@34.14,9.2 v1(34.05,9.2) ; v1@38.389,8.369 ccw(c37.928,7.908) 37.928,8.56 ccw(c37.928,9.212) v1@38.389,8.751 ; v1@38.58,8.77 v1(38.58,8.56) 34.69,8.56 v1(34.05,9.2) ; v2(41.361,23.28) 49.43,23.28 ; v1(41.49,33.21) 46.91,33.21 47.58,32.54 v1@47.7,32.54 ; v2@41.517,23.124 cw(c41.893,22.749) 41.893,23.28 cw(c41.893,23.811) v2@41.517,23.436 ; v1@41.681,33.019 cw(c42.142,32.558) 42.142,33.21 cw(c42.142,33.862) v1@41.681,33.401 ; v1@42.87,12.36 v1(43,12.36) 46.42,12.36 46.75,12.03 46.75,11.4 47.72,10.43 49.06,10.43 v1@49.18,10.31 ; v1@43.191,12.169 cw(c43.652,11.708) 43.652,12.36 cw(c43.652,13.012) v1@43.191,12.551 ; 46.954,33.166 cw(c46.407,32.62) v1@47.18,32.62 ; 47.074,33.046 ccw(c47.45,33.421) v1@47.45,32.89 ; 47.227,32.893 cw(c46.954,32.62) v1@47.34,32.62 ; v1@47.259,32.429 cw(c46.798,31.968) 47.45,31.968 cw(c48.102,31.968) v1@47.641,32.429 ; v1(47.45,32.62) 47.45,27.71 ; 47.5,27.66 47.45,27.71 ; 47.827,27.71 cw(c47.827,27.065) v1@48.291,27.514 ; 47.98,10.43 cw(c47.98,9.3) v1@48.779,10.099 ; 48.008,27.71 ccw(c48.008,27.952) v1@48.179,27.781 ; v1@48.176,27.402 ccw(c47.45,26.7) 47.45,27.71 ; 48.366,10.43 cw(c48.366,9.686) v1@48.892,10.212 ; v1@48.37,27.48 cw(c48.37,26.08) 49.36,27.07 ; v1@48.37,27.64 cw(c48.37,26.626) 49.087,27.343 ; v1@48.37,27.8 cw(c48.37,27.172) 48.814,27.616 ; JP3.9@48.668,7.382 ccw(c47.865,8.185) 49,8.185 ccw(c50.135,8.185) JP3.9@49.332,7.382 ; 48.72,27.71 47.45,27.71 ; 48.77,27.66 49.51,26.92 ; v1@48.779,10.481 ccw(c48.318,10.942) 48.97,10.942 ccw(c49.622,10.942) v1@49.161,10.481 ; JP3.9@48.781,7.269 ccw(c48.252,7.798) 49,7.798 ccw(c49.748,7.798) JP3.9@49.219,7.269 ; v1@48.822,10.064 cw(c48.642,9.79) 48.97,9.79 ; v2@48.874,9.104 cw(c48.571,8.801) 49,8.801 ; v2@48.874,9.416 ccw(c48.571,9.719) 49,9.719 ; JP3.9@49,7 49,9.76 ; 49,8.656 cw(c49.634,8.656) v2@49.186,9.104 ; v1@49,10.26 v1(48.97,10.29) ; v1@49.053,26.354 ccw(c48.931,26.92) 49.51,26.92 ; v1@49.07,25.987 cw(c48.824,25.347) 49.51,25.347 ; v1@49.087,26.198 ccw(c48.974,26.722) 49.51,26.722 ; v1(49.11,26.09) 49.19,26.17 49.51,26.17 ; v1@49.118,10.064 ccw(c49.298,9.79) 48.97,9.79 ; v1@49.121,26.041 ccw(c49.016,26.524) 49.51,26.524 ; v1@49.128,26.137 cw(c48.914,25.58) 49.51,25.58 ; v1@49.154,25.885 ccw(c49.059,26.325) 49.51,26.325 ; v2@49.162,9.436 cw(c49.405,9.76) 49,9.76 ; v1@49.185,26.286 cw(c49.004,25.813) 49.51,25.813 ; v1@49.319,26.261 ccw(c49.51,26.416) 49.51,26.17 ; v1@49.378,26.054 cw(c49.51,26.036) 49.51,26.17 ; v1(29.76,9.4) 29.76,9.28 30.33,8.71 33.64,8.71 34.05,9.12 v1(34.05,9.2) ; v1(29.76,9.4) 30.01,9.65 ; 48.97,9.79 49,9.76 ; 48.97,9.79 v1(48.97,10.29) ; v1(48.97,10.29) 48.97,21.09 49.51,21.63 49.51,25.2 49.51,26.92
  MidLayer1 w0.4: 1.94,5.41 1.94,11.23
  MidLayer1 w0.8: JP3.9@49,7 v1@49,10.26
  底层 w0.16: v2(0.57,11.23) 1.97,11.23 C29.1@2.1,11.1 ; v2@0.726,11.074 cw(c1.101,10.699) 1.101,11.23 cw(c1.101,11.761) v2@0.726,11.386 ; v1@0.77,20.541 cw(c0.663,20.454) 0.782,20.386 cw(c0.893,20.322) v1@0.921,20.447 ; C31.1@0.774,19.526 ccw(c0.227,20.073) 1,20.073 ccw(c1.773,20.073) C31.1@1.226,19.526 ; v1@0.789,20.519 cw(c0.28,20.01) 1,20.01 ; 0.79,20.4 v1@1.122,20.976 ; C31.1@1,19.3 v1@1,20.84 ; 1,20.106 cw(c1.584,20.106) v1@1.171,20.519 ; 1.014,11.23 cw(c1.014,10.014) C29.1@1.874,10.874 ; 1.4,11.23 cw(c1.4,10.4) C29.1@1.987,10.987 ; 1.641,11.23 ccw(c1.641,11.559) C29.1@1.874,11.326 ; JP8.1@6.6,23.9 6.73,23.77 7.458,23.77 ; JP8.1@6.985,23.987 ccw(c7.258,24.049) 7.258,23.77 ; JP8.1@7.042,23.564 cw(c7.458,23.246) 7.458,23.77 ; JP8.1@7.141,24.023 ccw(c7.458,24.095) 7.458,23.77 ; IC2.1@7.668,17.332 ccw(c6.865,18.135) 8,18.135 ccw(c9.135,18.135) IC2.1@8.332,17.332 ; IC2.1@7.781,17.219 ccw(c7.252,17.748) 8,17.748 ccw(c8.748,17.748) IC2.1@8.219,17.219 ; C30.2@7.912,19.993 cw(c7.7,19.78) C30.2@8,19.78 ; 7.997,23.231 ccw(c8.53,23.763) v1@8.53,23.01 ; IC2.1@8,16.84 IC2.1@8,17 8,20.271 C30.2@8.529,20.8 v1@8.529,22.699 ; IC2.1@8,17.226 cw(c11.913,17.226) C30.2@9.146,19.993 ; 8,17.612 cw(c11.526,17.612) C30.2@9.033,20.106 ; 8,17.999 cw(c11.14,17.999) C30.2@8.92,20.219 ; 8,18.385 cw(c10.754,18.385) C30.2@8.807,20.332 ; 8,18.771 cw(c10.367,18.771) C30.2@8.693,20.445 ; 8,19.157 cw(c9.981,19.157) C30.2@8.58,20.558 ; 8,19.544 cw(c9.595,19.544) C30.2@8.467,20.671 ; C30.2@8.017,21.697 ccw(c7.293,22.699) v1@8.529,22.699 ; 8.099,23.129 cw(c7.71,22.74) v1@8.26,22.74 ; C30.2@8.111,21.568 ccw(c7.519,22.386) 8.529,22.386 ccw(c9.539,22.386) C30.2@8.947,21.568 ; C30.2@8.205,21.438 ccw(c7.746,22.072) 8.529,22.072 ccw(c9.312,22.072) C30.2@8.853,21.438 ; v1@8.339,22.549 cw(c7.881,22.091) 8.529,22.091 ; 8.529,22.086 cw(c9.184,22.086) v1@8.721,22.549 ; C30.2@9.041,21.697 cw(c9.765,22.699) v1@8.529,22.699 ; v2@9.621,28.538 cw(c9.012,27.878) C23.2@9.91,27.878 ; C23.2@9.709,28.139 ccw(c9.369,28.56) v2@9.91,28.56 ; v2@9.729,28.656 cw(c9.349,28.243) C23.2@9.91,28.243 ; v2(9.77,28.7) v2@9.91,28.56 ; C23.2@9.91,27.89 v2@9.91,28.56 ; C23.2@10.111,28.139 cw(c10.451,28.56) v2@9.91,28.56 ; v1@12.87,33.76 cw(c12.87,33.108) 13.331,33.569 cw(c13.792,34.03) v1@13.14,34.03 ; v1(12.87,34.03) C22.2@14.01,32.89 14.01,33.64 ; v2@13.296,11.417 ccw(c12.921,11.793) 13.452,11.793 ccw(c13.983,11.793) v2@13.607,11.417 ; v2@13.452,11.223 cw(c14.101,11.223) C11.2@13.839,11.817 ; v2(13.452,11.262) 13.452,11.852 C11.2@13.71,12.11 ccw(c13.885,11.714) 13.452,11.714 ; v2@13.452,11.469 cw(c13.993,11.469) C11.2@13.775,11.964 ; C22.2@13.69,32.89 ccw(c12.917,32.89) 13.464,33.436 ccw(c14.01,33.983) C22.2@14.01,33.21 ; C22.2@13.789,33.121 ccw(c13.291,33.64) 14.01,33.64 ; C22.2@14.231,33.121 cw(c14.729,33.64) 14.01,33.64 ; 16.878,36.508 cw(c17.51,35.876) C21.2@17.51,36.77 ; 16.999,36.629 ccw(c16.538,37.09) C21.2@17.19,37.09 ; 17.149,8.931 ccw(c17.9,9.682) R3.1@17.9,8.62 ; 17.151,36.781 cw(c17.51,36.423) C21.2@17.51,36.93 ; 17.422,8.658 ccw(c17.9,9.136) R3.1@17.9,8.46 ; 17.439,8.641 cw(c17.097,8.3) R3.1@17.58,8.3 ; C21.2@17.51,37.09 17.51,37.1 20.01,39.6 35.34,39.6 37.94,37 C18.2@37.94,36.65 ; C21.2@17.51,37.41 ccw(c17.51,38.158) 18.039,37.629 ; C21.2@17.67,37.09 cw(c18.081,37.09) 17.79,37.38 ; C21.2@17.75,37.22 17.67,37.3 14.01,33.64 ; C21.2@17.83,37.09 cw(c18.627,37.09) 18.063,37.653 ; 17.864,10.264 cw(c18.41,9.717) v2@18.41,10.49 ; R3.1@17.9,8.3 17.78,8.3 17.06,9.02 17.06,9.46 18.31,10.71 v2(18.41,10.71) ; v1(17.92,18.63) 18.35,18.63 ; 18.105,10.505 ccw(c17.9,10.71) v2@18.19,10.71 ; 18.137,10.537 cw(c18.41,10.264) v2@18.41,10.65 ; v1@18.163,18.513 cw(c18.35,18.423) 18.35,18.63 ; v1@18.163,18.747 ccw(c18.35,18.837) 18.35,18.63 ; C10.2@19.09,18.29 18.69,18.29 18.35,18.63 ; C12.2@22.39,14.09 22.79,13.69 ; C12.2@22.467,13.779 cw(c22.549,13.449) 22.79,13.69 ; v1@22.658,13.466 ccw(c22.533,13.69) 22.79,13.69 ; C12.2@22.7,14.013 ccw(c23.03,13.93) 22.79,13.69 ; v1(22.79,13.23) 22.79,13.69 ; C4.2@22.912,26.493 cw(c21.423,25.003) 23.529,25.003 cw(c25.635,25.003) C4.2@24.146,26.493 ; v1@22.922,13.466 cw(c23.047,13.69) 22.79,13.69 ; C4.2@23.025,26.606 cw(c21.809,25.389) 23.529,25.389 cw(c25.249,25.389) C4.2@24.033,26.606 ; C4.2@23.138,26.719 cw(c22.195,25.776) 23.529,25.776 cw(c24.863,25.776) C4.2@23.92,26.719 ; v1@23.239,32.859 cw(c22.778,32.398) 23.43,32.398 cw(c24.082,32.398) v1@23.621,32.859 ; v1@23.369,31.521 ccw(c23.222,31.668) 23.43,31.668 ; v2@23.373,23.965 ccw(c22.998,24.34) 23.529,24.34 ccw(c24.06,24.34) v2@23.685,23.965 ; v2@23.373,25.044 cw(c22.998,24.669) 23.529,24.669 cw(c24.06,24.669) v2@23.685,25.044 ; v2@23.373,25.356 ccw(c22.998,25.731) 23.529,25.731 ccw(c24.06,25.731) v2@23.685,25.356 ; 23.43,31.909 ccw(c24.139,31.909) v1@23.638,31.408 ; 23.43,32.296 ccw(c24.526,32.296) v1@23.751,31.521 ; v1@23.43,33.32 ccw(c23.43,33.972) 23.891,33.511 ccw(c24.352,33.05) v1@23.7,33.05 ; v2(23.529,23.809) C4.2@23.529,27.3 24.85,27.3 ; v1@23.56,31.06 cw(c23.56,30.384) 24.038,30.862 ; v1@23.83,31.33 ccw(c24.458,31.33) 24.014,30.886 ; C4.2@24.184,27.02 cw(c24.608,26.84) 24.608,27.3 cw(c24.608,27.76) C4.2@24.184,27.58 ; C4.2@24.331,26.958 cw(c24.85,26.736) 24.85,27.3 ; C4.2@24.331,27.642 ccw(c24.85,27.864) 24.85,27.3 ; v2@24.931,30.201 ccw(c24.548,30.238) 24.82,30.51 ; v2@25.129,30.399 cw(c25.092,30.782) 24.82,30.51 ; v2@25.15,29.96 cw(c25.15,29.429) 25.525,29.805 cw(c25.901,30.18) v2@25.37,30.18 ; R7.1@25.3,4.6 26.55,4.6 27.06,5.11 v1@27.06,6.07 ; v1@25.349,14.231 ccw(c24.767,14.813) 25.59,14.813 ; v1@25.359,13.84 cw(c24.886,13.318) 25.59,13.318 ; v1@25.462,14.118 ccw(c25.154,14.426) 25.59,14.426 ; v1@25.466,13.958 cw(c25.213,13.679) 25.59,13.679 ; C20.2@25.484,34.184 ccw(c24.937,33.637) 24.937,34.41 ccw(c24.938,35.183) C20.2@25.484,34.636 ; R7.1@25.526,4.374 cw(c26.073,3.827) 26.073,4.6 cw(c26.073,5.373) R7.1@25.526,4.826 ; C8.2@25.55,15.35 25.59,15.31 25.59,13.32 27.23,11.68 v1(27.23,9.91) ; 25.59,13.509 cw(c26.071,13.509) v1@25.731,13.849 ; v1@25.59,13.986 cw(c27.114,13.986) C8.2@26.036,15.064 ; v1@25.59,14.372 cw(c26.728,14.372) C8.2@25.923,15.177 ; 25.59,14.571 ccw(c26.071,14.571) v1@25.731,14.231 ; 25.59,14.759 cw(c26.341,14.759) C8.2@25.81,15.29 ; 25.666,28.116 ccw(c25.222,28.56) v2@25.85,28.56 ; C20.2@25.71,34.09 cw(c25.71,32.835) v1@26.598,33.722 ; C20.2@25.71,34.25 cw(c25.71,33.381) v1@26.325,33.995 ; 25.763,28.213 cw(c26.07,27.905) v2@26.07,28.34 ; C20.2@26.012,34.308 ccw(c26.49,34.786) v1@26.49,34.11 ; C20.2@26.03,34.41 ccw(c26.32,34.41) 26.115,34.205 ; C20.2@26.036,34.284 cw(c25.592,33.84) v1@26.22,33.84 ; v2@26.102,28.778 ccw(c26.159,29.171) 26.44,28.89 ; v2@26.29,28.56 cw(c26.725,28.56) 26.417,28.867 ; v1@26.49,33.57 cw(c26.49,32.942) C19.2@26.934,33.386 ; 26.694,28.89 ccw(c26.694,30.015) C3.2@27.708,29.528 ; v1@26.76,33.84 ccw(c27.436,33.84) C19.2@26.958,33.362 ; C19.2@26.89,33.11 ccw(c26.117,33.11) 26.664,33.656 ccw(c27.21,34.203) C19.2@27.21,33.43 ; 26.948,28.89 ccw(c26.948,29.893) C3.2@27.852,29.459 ; v1@27.039,10.101 ccw(c26.578,10.562) 27.23,10.562 ccw(c27.882,10.562) v1@27.421,10.101 ; 27.041,28.89 cw(c27.041,27.91) C3.2@27.734,28.603 ; 27.06,5.095 cw(c28.09,5.095) v1@27.409,5.868 ; 27.06,5.45 cw(c27.777,5.45) v1@27.303,5.988 ; v1(27.18,37.47) v1@27.29,37.58 ; 27.203,28.89 ccw(c27.203,29.771) C3.2@27.997,29.39 ; C19.2@27.21,32.61 C19.2@27.21,33.11 25.91,34.41 C20.2@25.71,34.41 24.79,34.41 v1(23.43,33.05) 23.43,31.47 24.39,30.51 24.82,30.51 ; v1(27.23,6.07) 27.9,6.74 ; v1@27.23,6.34 ccw(c27.23,6.992) 27.691,6.531 ccw(c28.152,6.07) v1@27.5,6.07 ; C3.2@27.427,28.89 cw(c27.427,28.297) C3.2@27.847,28.716 ; v1@27.46,6.3 ccw(c26.966,6.794) C13.2@27.607,7.072 ; C3.2@27.564,29.597 cw(c26.44,30.136) 26.44,28.89 ; 27.626,6.466 ccw(c27.198,6.894) C13.2@27.753,7.136 ; C13.2@27.789,6.9 cw(c27.729,6.74) 27.9,6.74 ; 27.792,6.632 ccw(c27.429,6.995) C13.2@27.9,7.2 ; C13.2@27.9,7.3 27.9,6.74 ; C13.2@28.011,6.9 ccw(c28.071,6.74) 27.9,6.74 ; IC5.7@28.023,21.58 29.22,21.58 29.84,22.2 C35.2@30,22.2 31.41,22.2 ; v2@28.29,18.27 28.29,18.29 v2(31.41,21.41) 31.41,22.2 ; v2@28.43,18.65 ccw(c28.43,19.181) 28.806,18.806 ccw(c29.181,18.43) v2@28.65,18.43 ; C3.2@28.485,29.085 28.901,28.67 31.52,28.67 ; C3.2@28.55,28.89 26.44,28.89 ; IC5.7@28.703,21.421 cw(c29.087,21.037) 29.087,21.58 cw(c29.087,22.123) IC5.7@28.703,21.739 ; C3.2@28.784,29.115 ccw(c29.859,30.189) 29.859,28.67 ; C3.2@28.898,29.228 ccw(c30.245,30.576) 30.245,28.67 ; C3.2@29.011,29.341 ccw(c30.631,30.962) 30.631,28.67 ; C3.2@29.124,28.447 cw(c29.663,27.908) C3.2@29.663,28.67 ; C3.2@29.124,29.454 ccw(c31.018,31.348) 31.018,28.67 ; 29.181,21.541 cw(c30,20.721) C35.2@30,21.88 ; C3.2@29.237,28.334 cw(c30.049,27.522) 30.049,28.67 ; C3.2@29.237,29.568 ccw(c31.404,31.735) 31.404,28.67 ; 29.454,21.814 cw(c30,21.267) C35.2@30,22.04 ; 29.567,21.927 ccw(c29.294,22.2) C35.2@29.68,22.2 ; v2@29.62,19.84 cw(c29.089,19.84) 29.464,19.464 cw(c29.84,19.089) v2@29.84,19.62 ; v2@29.84,20.06 ccw(c29.84,20.591) 30.216,20.216 ccw(c30.591,19.84) v2@30.06,19.84 ; C35.2@30.226,21.974 cw(c30.773,21.427) 30.773,22.2 cw(c30.773,22.973) C35.2@30.226,22.426 ; v2@31.19,21.41 cw(c30.659,21.41) 31.034,21.034 cw(c31.41,20.659) v2@31.41,21.19 ; v2@31.254,21.566 ccw(c30.879,21.941) 31.41,21.941 ccw(c31.941,21.941) v2@31.566,21.566 ; 31.886,28.304 ccw(c32.62,29.038) v1@32.62,28 ; 32.159,28.031 ccw(c32.62,28.492) v1@32.62,27.84 ; v2@32.195,23.205 cw(c31.663,23.205) 32.039,22.829 cw(c32.415,22.453) v2@32.415,22.985 ; 32.272,27.918 cw(c32.084,27.73) v1@32.35,27.73 ; v2@32.415,23.425 ccw(c32.415,23.956) 32.79,23.58 ccw(c33.166,23.205) v2@32.635,23.205 ; v1@32.62,27.46 cw(c32.62,27.194) 32.808,27.382 ; v1@32.73,27.73 ccw(c33.382,27.73) 32.921,27.269 ; 32.767,30.587 ccw(c32.203,31.15) v1@33,31.15 ; v1@32.89,27.73 ccw(c33.928,27.73) 33.194,26.996 ; 32.912,30.732 cw(c33.27,30.373) v1@33.27,30.88 ; 33.04,30.86 ccw(c32.75,31.15) v1@33.16,31.15 ; v2@33.173,24.183 cw(c32.642,24.183) 33.017,23.807 cw(c33.393,23.432) v2@33.393,23.963 ; v1@33.27,31.29 33.27,31.09 31.52,29.34 31.52,28.67 ; v2@33.393,24.403 ccw(c33.393,24.934) 33.768,24.558 ccw(c34.144,24.183) v2@33.613,24.183 ; 33.442,26.748 ccw(c34.21,27.517) C17.2@34.21,26.43 ; 33.715,26.475 ccw(c34.21,26.97) C17.2@34.21,26.27 ; 33.756,26.434 cw(c33.432,26.11) C17.2@33.89,26.11 ; v1@34.05,8.93 cw(c34.05,8.061) 34.665,8.675 ; v1@34.05,9.09 cw(c34.05,8.607) 34.391,8.949 ; v1@34.14,9.2 35.38,7.96 35.38,6.76 35.5,6.64 C6.1@35.5,5.088 ; C17.2@34.21,25.79 cw(c34.21,25.332) 34.534,25.656 ; v1@34.32,9.2 ccw(c34.755,9.2) 34.447,8.893 ; C17.2@34.37,26.11 ccw(c35.07,26.11) 34.575,25.615 ; C17.2@34.53,26.11 ccw(c35.617,26.11) 34.848,25.342 ; 34.605,25.585 ccw(c35.51,26.489) C7.2@35.51,25.21 ; 34.65,25.54 34.65,25.44 31.41,22.2 ; 34.878,25.312 ccw(c35.51,25.943) C7.2@35.51,25.05 ; 35.112,25.078 cw(c34.924,24.89) C7.2@35.19,24.89 ; C6.1@35.274,5.314 ccw(c34.727,5.86) 35.5,5.86 ccw(c36.273,5.86) C6.1@35.726,5.314 ; C5.1@35.274,6.274 cw(c34.727,5.727) 35.5,5.727 cw(c36.273,5.727) C5.1@35.726,6.274 ; C5.1@35.274,6.726 ccw(c35.017,6.983) 35.38,6.983 ; 35.38,7.176 ccw(c36.176,7.176) C5.1@35.613,6.613 ; 35.38,7.562 ccw(c36.562,7.562) C5.1@35.726,6.726 ; C7.2@35.51,24.89 35.3,24.89 31.52,28.67 ; 36.463,38.477 cw(c36.036,38.05) v2@36.64,38.05 ; 36.536,38.404 ccw(c36.86,38.729) v2@36.86,38.27 ; v2@36.818,38.122 cw(c35.487,36.79) C18.2@37.37,36.79 ; v2@36.86,37.83 cw(c36.86,37.226) 37.287,37.653 ; v2@37.08,38.05 ccw(c37.539,38.05) 37.214,37.726 ; 37.091,37.849 cw(c36.033,36.79) C18.2@37.53,36.79 ; 37.365,37.575 cw(c36.579,36.79) C18.2@37.69,36.79 ; C18.2@37.638,37.302 cw(c37.125,36.79) C18.2@37.85,36.79 ; C18.2@37.69,36.47 cw(c37.69,35.166) 38.612,36.088 ; C18.2@37.69,36.63 cw(c37.69,35.712) 38.339,36.361 ; C18.2@38.01,36.79 ccw(c38.251,36.79) C18.2@38.081,36.619 ; C18.2@38.066,36.634 ccw(c37.69,36.259) C18.2@37.69,36.79 ; v1(38.58,8.56) C14.2@39.33,9.31 ; v1@38.58,8.83 ccw(c38.58,9.482) 39.041,9.021 ccw(c39.502,8.56) v1@38.85,8.56 ; v1@38.741,8.721 cw(c39.39,8.073) C14.2@39.39,8.99 ; v2@38.86,24.54 cw(c38.86,24.009) 39.236,24.384 cw(c39.611,24.76) v2@39.08,24.76 ; v2(38.86,24.76) 40.34,23.28 v2(41.361,23.28) ; 38.886,8.866 ccw(c38.442,9.31) C14.2@39.07,9.31 ; 39.015,8.995 cw(c39.39,8.619) C14.2@39.39,9.15 ; 39.431,24.189 ccw(c39.96,24.718) v2@39.96,23.97 ; 39.648,23.972 cw(c39.426,23.75) v2@39.74,23.75 ; 39.704,23.916 ccw(c39.96,24.172) v2@39.96,23.81 ; v2@39.96,23.53 cw(c39.96,23.216) 40.182,23.438 ; v2@40.176,23.709 ccw(c40.6,23.63) 40.295,23.325 ; v2@41.206,23.124 ccw(c40.83,22.749) 40.83,23.28 ccw(c40.83,23.811) v2@41.206,23.436 ; v1@41.22,33.21 ccw(c40.568,33.21) 41.029,33.671 ccw(c41.49,34.132) v1@41.49,33.48 ; v1(41.49,33.21) 37.91,36.79 C18.2@37.69,36.79 ; C15.2@42.774,12.974 cw(c42.227,12.427) 43,12.427 cw(c43.773,12.427) C15.2@43.226,12.974 ; v1@42.809,12.551 ccw(c42.348,13.012) 43,13.012 ccw(c43.652,13.012) v1@43.191,12.551 ; v1@43,12.21 C15.2@43,13.45 ; C16.2@45.19,27.59 v1(48.37,27.59) ; C16.2@45.416,27.364 cw(c45.963,26.817) 45.963,27.59 cw(c45.963,28.363) C16.2@45.416,27.816 ; v1@48.179,27.399 ccw(c47.718,26.938) 47.718,27.59 ccw(c47.718,28.242) v1@48.179,27.781 ; 7.458,23.77 v1@8.529,22.699 ; 24.82,30.51 26.44,28.89 ; 24.85,27.3 26.44,28.89 ; C14.2@39.33,9.31 C14.2@39.39,9.31 C14.2@39.33,9.31
  底层 w0.3: v1@29.76,9.6 ccw(c29.76,10.542) 30.426,9.876 ; v1@29.95,9.4 C24.2@31.01,10.46 ; 30.548,9.998 ccw(c30.036,10.51) C24.2@30.76,10.51 ; 30.669,10.119 cw(c31.01,9.777) C24.2@31.01,10.26
  other v2: 49.03,9.26 6.9,13.6 22.97,17.99 28.43,18.43 21.49,18.63 15.05,18.75 29.84,19.84 32.415,23.205 39.96,23.75 33.393,24.183 23.529,25.2 26.07,28.56 25.15,30.18 22.7,30.4 36.86,38.05
GNDA: C1.1 IC1.37 L2.1 | length 19.8
  顶层 w0.16: IC1.37@41.142,18.111 IC1.37@41.159,18.111 ; v1@42.81,16.46 v1(43.02,16.46) ; C1.1@46,15.1 C1.1@46.12,14.98 ; L2.1@48.06,13.96 L2.1@48.18,14.08
  顶层 w0.25: IC1.37@41.159,18.111 v1@42.81,16.46 ; 41.992,17.278 ccw(c42.53,17.815) v2@42.53,17.055 ; v2@42.277,16.993 ccw(c43.02,17.735) v1@43.02,16.685 ; v2@42.689,16.808 ccw(c42.915,16.705) v1@42.74,16.53
  顶层 w0.4: C1.1@45.979,14.839 cw(c45.637,14.497) 46.12,14.497 cw(c46.603,14.497) C1.1@46.261,14.839 ; v1@46.014,14.066 ccw(c45.758,14.322) 46.12,14.322 ccw(c46.482,14.322) 46.226,14.066 ccw(c46.482,14.322) 46.482,13.96 ccw(c46.482,13.598) v1@46.226,13.854 ; C1.1@46.12,14.98 v1(46.12,13.96) L2.1@48.06,13.96 ; v1@46.394,13.96 ccw(c46.394,16.079) L2.1@47.892,14.581 ; 47.36,13.96 ccw(c47.36,15.113) L2.1@48.175,14.298
  底层 w0.16: v1@42.95,16.46 v1(43.02,16.46) ; v1@46.08,13.92 v1(46.12,13.96) ; v2@47.06,13.96 v2@47.1,13.92
  底层 w0.4: v2(42.53,16.88) v1@42.95,16.46 ; v2@42.644,16.766 ccw(c43.02,17.141) v1@43.02,16.61 ; v1@43.02,16.31 cw(c43.02,15.948) 43.276,16.204 cw(c43.532,16.46) v1@43.17,16.46 ; v1(43.02,16.46) 45.56,13.92 v1@46.08,13.92 ; 45.661,13.92 ccw(c45.661,14.419) v1@46.014,14.066 ; v1(46.12,13.96) v2@47.06,13.96 ; v1@46.226,13.854 cw(c46.482,13.598) 46.482,13.96 cw(c46.482,14.322) v1@46.226,14.066
  other v2: 46.89,13.96
NetIC1_31: C9.1 IC1.31 R4.2 S1.1 | length 28
  顶层 w0.16: S1.1@47.38,26.3 S1.1@47.8,26.3
  顶层 w0.2: 38.21,16.8 IC1.31@39.021,15.99
  顶层 w0.3: 38.21,16.8 38.21,17.53 38.21,18.88 41.29,21.96 v1(43.45,21.96) ; v1@43.309,21.819 ccw(c42.967,21.477) 42.967,21.96 ccw(c42.967,22.443) v1@43.309,22.101 ; v1@46.649,22.441 ccw(c46.307,22.783) 46.79,22.783 ccw(c47.273,22.783) v1@46.931,22.441 ; v1(46.79,22.3) 46.79,23.29 R4.2@47,23.5 C9.1@47,25 47,25.92 S1.1@47.38,26.3 ; v1@46.79,22.389 cw(c48.111,22.389) R4.2@47.177,23.323 ; R4.2@46.79,23.114 cw(c47.386,23.114) R4.2@46.965,23.535 ; R4.2@46.823,23.677 ccw(c46.396,24.104) 47,24.104 ccw(c47.604,24.104) R4.2@47.177,23.677 ; C9.1@46.823,24.823 cw(c46.396,24.396) 47,24.396 cw(c47.604,24.396) C9.1@47.177,24.823 ; C9.1@46.823,25.177 ccw(c46.396,25.604) 47,25.604 ccw(c47.604,25.604) C9.1@47.177,25.177 ; 47.161,26.081 cw(c47.623,25.619) S1.1@47.787,26.252
  底层 w0.3: v1(43.45,21.96) 46.45,21.96 ; v1@43.591,21.819 cw(c43.933,21.477) 43.933,21.96 cw(c43.933,22.443) v1@43.591,22.101 ; 45.486,21.96 ccw(c45.486,23.604) v1@46.649,22.441 ; 46.211,21.96 ccw(c46.211,22.879) v1@46.861,22.229 ; v1@46.59,22.299 cw(c46.112,22.298) 46.45,21.96 ; v1@46.789,22.1 ccw(c46.788,21.622) 46.45,21.96 ; v1(46.79,22.3) 46.45,21.96
NetIC1_81: C3.1 IC1.81 | length 13.9
  顶层 w0.25: 29.92,34.117 ccw(c30.577,34.117) v1@30.112,33.652 ; 29.92,34.72 ccw(c31.18,34.72) v1@30.289,33.829 ; v1(30.13,33.67) 29.92,33.88 29.92,35.173 IC1.81@30.889,36.142
  底层 w0.25: v1@29.971,33.511 cw(c29.587,33.127) 30.13,33.127 cw(c30.673,33.127) v1@30.289,33.511 ; C3.1@30.107,32.133 ccw(c29.926,32.266) 30.085,32.425 ccw(c30.27,32.61) C3.1@30.392,32.378 ; 30.13,32.639 ccw(c31.097,32.639) C3.1@30.799,31.718 ; 30.13,32.982 ccw(c31.209,32.982) C3.1@30.876,31.956 ; v1@30.13,33.326 ccw(c31.32,33.326) C3.1@30.953,32.194 ; C3.1@30.81,31.7 30.13,32.38 v1(30.13,33.67) ccw(c31.431,33.67) C3.1@31.03,32.432
NetIC1_125: C4.1 IC1.125 | length 14.4
  顶层 w0.25: IC1.125@13.211,25.536 14.587,24.16 15.48,24.16 17.68,26.36 v1(18.39,27.07) ; v1@18.165,27.07 cw(c17.622,27.07) 18.006,26.686 cw(c18.39,26.302) v1@18.39,26.845
  底层 w0.25: v1@18.549,26.911 cw(c18.933,26.527) 18.933,27.07 ; v1@18.549,27.229 ccw(c18.933,27.613) 18.933,27.07 ; 18.883,27.07 ccw(c18.883,28.001) C4.1@19.634,27.451 ; C4.1@19.432,27.599 cw(c18.39,28.362) v1(18.39,27.07) ; C4.1@19.471,26.572 ccw(c18.39,25.648) v1(18.39,27.07) ; C4.1@19.661,26.734 ccw(c18.933,26.112) 18.933,27.07 ; C4.1@20.02,27.1 19.99,27.07 v1(18.39,27.07)
NetJP8_4: D2.K JP8.4 | length 11.5
  底层 w0.16: D2.K@9.35,31.52 10.072,32.242 D2.K@10.072,32.434
  底层 w0.5: JP8.4@6.6,31.52 D2.K@9.35,31.52 ; JP8.4@6.647,31.52 ccw(c6.647,35.364) D2.K@9.365,32.646 ; JP8.4@6.847,31.273 cw(c7.445,30.675) 7.445,31.52 cw(c7.445,32.365) JP8.4@6.847,31.767 ; 7.854,31.52 ccw(c7.854,34.157) D2.K@9.719,32.292 ; 9.061,31.52 ccw(c9.061,32.95) D2.K@10.072,31.939
NetJP9_1: IC1.166 JP9.1 R3.2 | length 14.7
  顶层 w0.16: IC1.166@22.05,8.919 22.059,8.919 v1(22.86,9.72) ; v1@22.59,9.72 cw(c21.938,9.72) 22.399,9.259 cw(c22.86,8.798) v1@22.86,9.45
  底层 w0.16: JP9.1@18.835,6.318 ccw(c17.686,7.63) 19.43,7.63 ; JP9.1@18.94,6.197 ccw(c17.995,7.277) 19.43,7.277 ; JP9.1@19.045,6.077 ccw(c18.303,6.925) 19.43,6.925 ; JP9.1@19.151,5.956 ccw(c18.612,6.572) 19.43,6.572 ; JP9.1@19.2,5.9 19.43,6.13 19.43,7.63 ; R3.2@19.3,8.3 19.3,8.29 R3.2@19.68,7.91 ; 19.43,6.685 ccw(c19.985,6.685) JP9.1@19.592,6.292 ; v1@22.59,9.72 cw(c21.938,9.72) 22.399,9.259 cw(c22.86,8.798) v1@22.86,9.45 ; v1(22.86,9.72) 21.24,8.1 19.9,8.1 19.43,7.63
NetLED3_2: LED3.2 R11.1 | length 4.2
  顶层 w0.16: R11.1@2.7,21.6 LED3.2@4.5,21.6 ; R11.1@2.926,21.374 cw(c3.473,20.827) 3.473,21.6 cw(c3.473,22.373) R11.1@2.926,21.826 ; LED3.2@4.274,21.374 ccw(c3.727,20.827) 3.727,21.6 ccw(c3.727,22.373) LED3.2@4.274,21.826